# Altium PCB PCB_RocketPDBV4_2025-05-21.pcbdoc
Units mil, origin at the board's own origin, x right, y up, seen from the top; angles counter-clockwise.
Board outline 3400 x 3095 mil, 2 copper layers (Top Layer, Bottom Layer); 32 components, 35 nets, 112 pads, 50 vias.
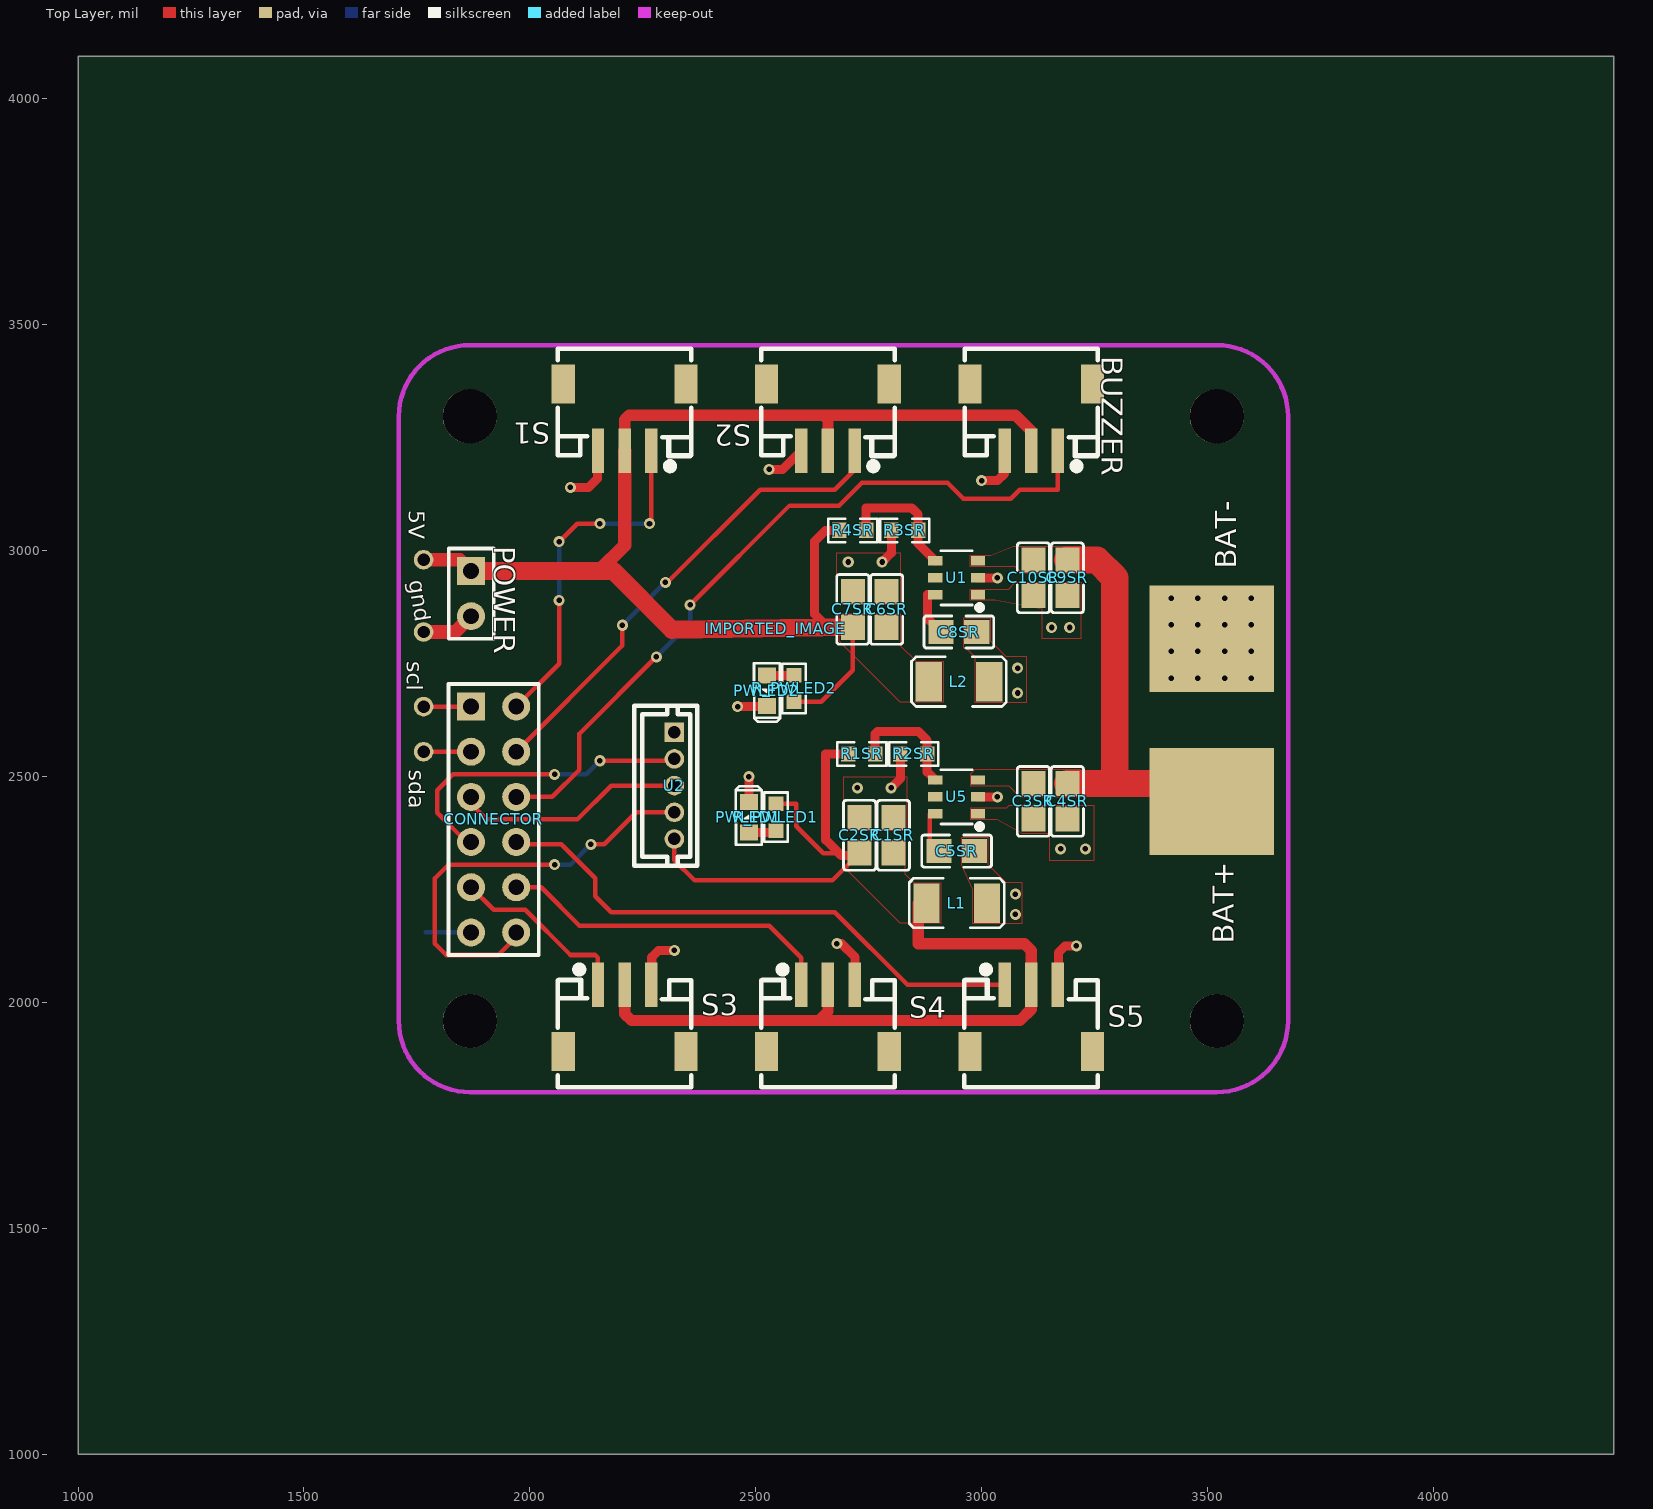
[diagram p0: Top Layer view]
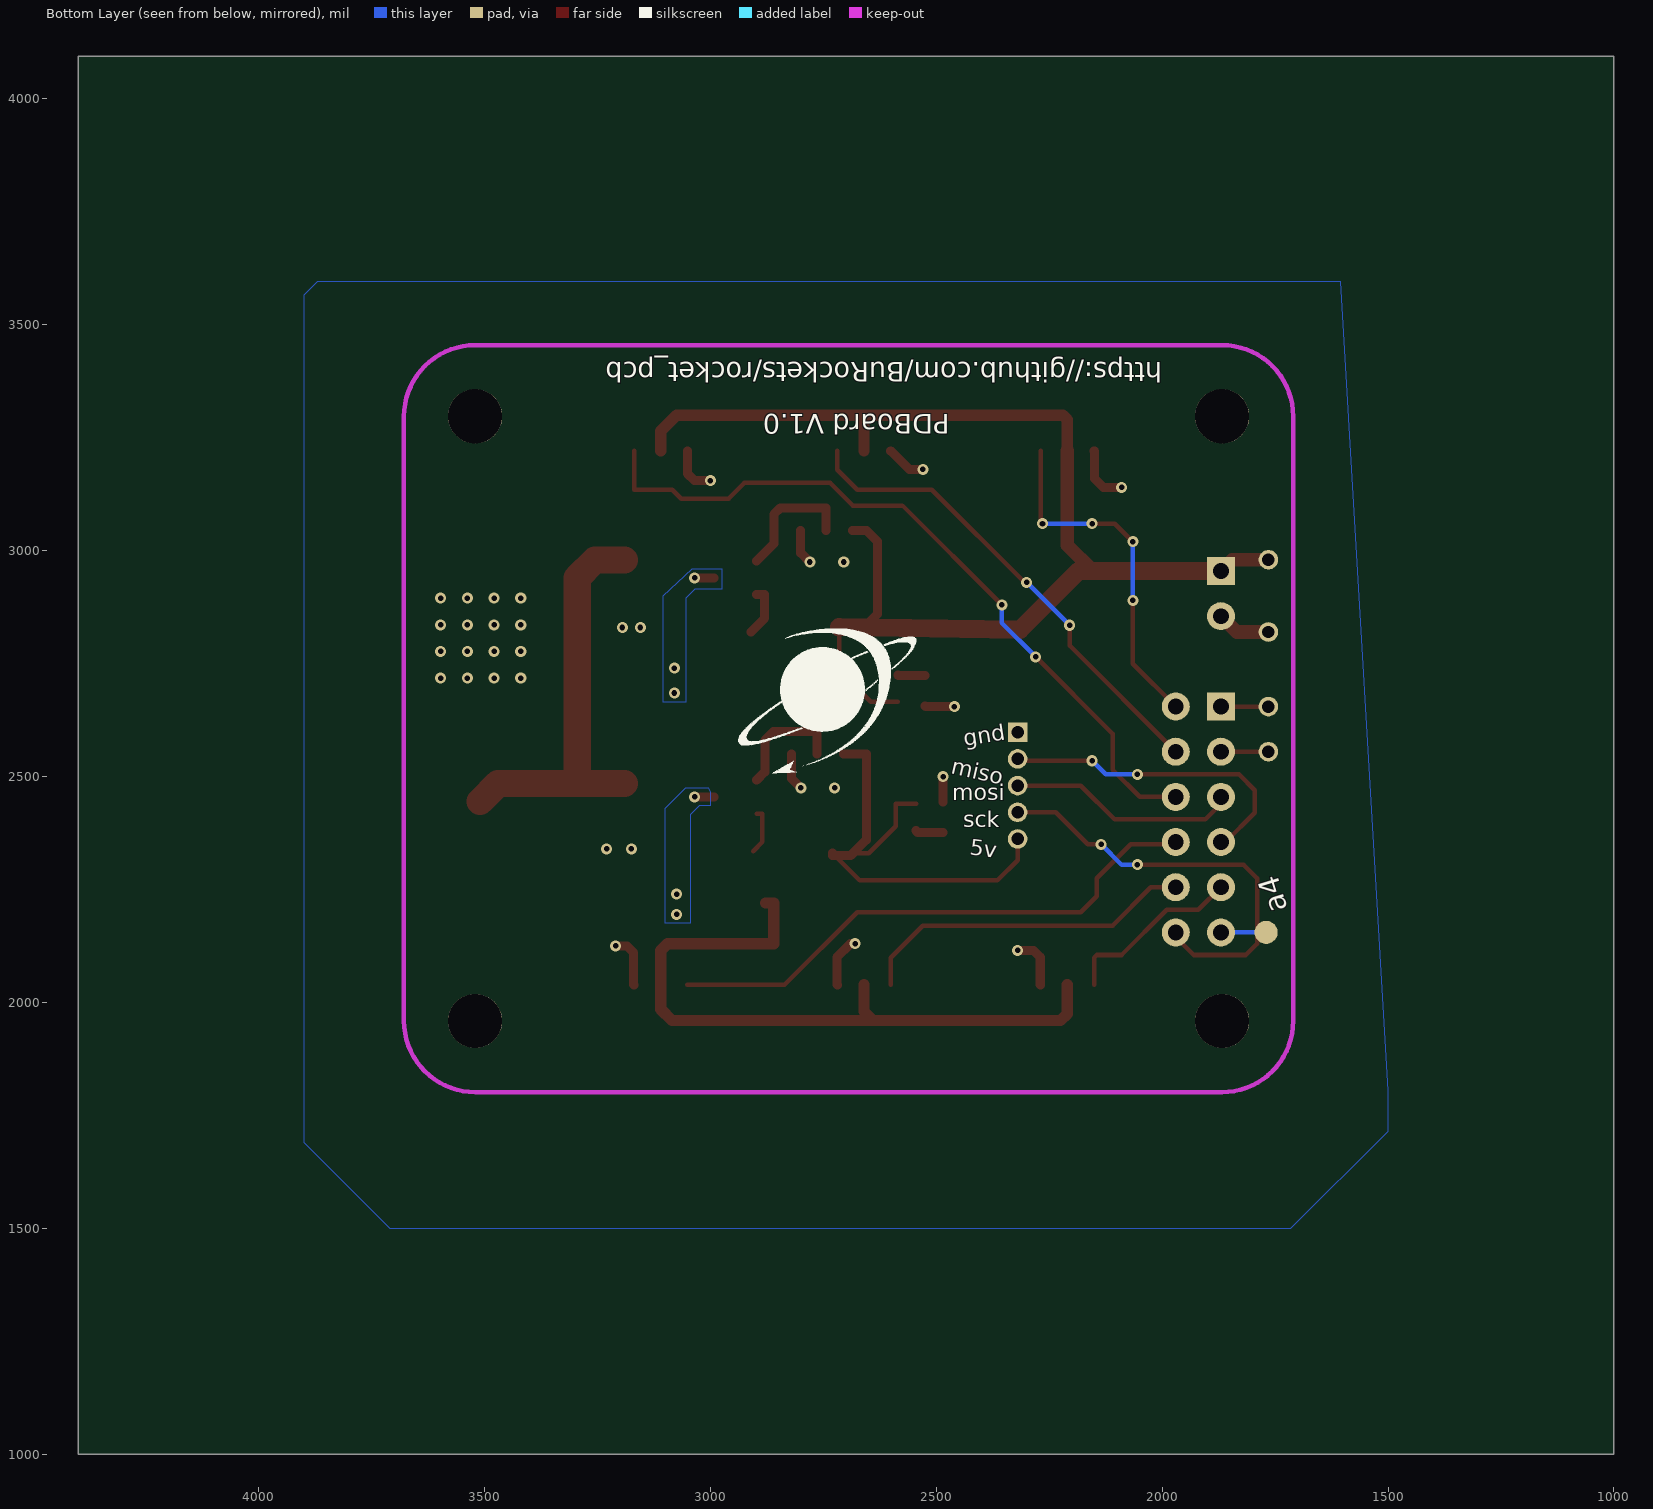
[diagram p1: Bottom Layer view, seen from below]

## Layer stack, top to bottom
Top Layer: signal copper (thickness not stored)
Dielectric: dielectric 12.6, FR-4, Dk 4.8
Bottom Layer: signal copper (thickness not stored)

## Board outline
4400,1000 1000,1000 1000,4095 4400,4095

## Components (designator, comment, footprint, x,y, rotation, side; value= is the part's Value field where it differs from the comment)
BUZZER "S3B-ZR-SM4A-TF(LF)(SN)" CONN-TH_S3B-ZR-SM4A-TF-LF-SN 3110,3294.99 r180 top
C1SR "22u" C0805 2805,2370 r270 top
C2SR "22u" C0805 2730,2370 r270 top
C3SR "10u" C0805 3115,2445 r90 top
C4SR "0.1u" C0805 3190,2445 r90 top
C5SR "0.1u" C0805 2945,2335 r180 top
C6SR "22u" C0805 2790,2870 r270 top
C7SR "22u" C0805 2715,2870 r270 top
C8SR "0.1u" C0805 2950,2820 r180 top
C9SR "0.1u" C0805 3190,2940 r90 top
C10SR "10u" C0805 3115,2940 r90 top
CONNECTOR "HDR-F-2.54_2x6" HDR-F-2.54_2X6 1920,2405 r270 top
IMPORTED_IMAGE "IMPORTED_IMAGE" IMPORTED_IMAGE 2544.73,2827.53 r0 top
L1 "10uH" L1210 2945,2220 r0 top
L2 "10uH" L1210 2950,2710 r0 top
POWER "HDR-F-2.54_1x2" HDR-F-2.54_1X2 1870,2905 r270 top
PWLED1 "LED-0603_R" LED0603_RED 2485,2410 r90 top
PWLED2 "LED-0603_R" LED0603_RED 2525,2690 r270 top
R1SR "100k" R0603 2735,2550 r180 top
R2SR "13.3k" R0603 2850,2550 r0 top
R3SR "13.3k" R0603 2830,3045 r0 top
R4SR "100k" R0603 2715,3045 r180 top
R_PWLED1 "10k" R0603 2545,2410 r270 top
R_PWLED2 "10k" R0603 2585,2695 r90 top
S1 "S3B-ZR-SM4A-TF(LF)(SN)" CONN-TH_S3B-ZR-SM4A-TF-LF-SN 2210,3294.99 r180 top
S2 "S3B-ZR-SM4A-TF(LF)(SN)" CONN-TH_S3B-ZR-SM4A-TF-LF-SN 2660,3294.99 r180 top
S3 "S3B-ZR-SM4A-TF(LF)(SN)" CONN-TH_S3B-ZR-SM4A-TF-LF-SN 2210,1964.99 r0 top
S4 "S3B-ZR-SM4A-TF(LF)(SN)" CONN-TH_S3B-ZR-SM4A-TF-LF-SN 2660,1964.99 r0 top
S5 "S3B-ZR-SM4A-TF(LF)(SN)" CONN-TH_S3B-ZR-SM4A-TF-LF-SN 3110,1964.99 r0 top
U1 "TPS54308DDCT" TSOT-23-6_L2.9-W1.6-P0.95-LS2.8-BR 2945,2940 r0 top
U2 "B5B-ZR-(LF)(SN)" CONN-TH_5P-P1.50_B5B-ZR-LF-SN 2320.01,2480 r270 top
U5 "TPS54308DDCT" TSOT-23-6_L2.9-W1.6-P0.95-LS2.8-BR 2945,2455 r0 top

## Footprints (in the part's own frame and the unit in brackets; to place one, negate y for a bottom-side part, rotate by r counter-clockwise, add the part's x,y. Pads: shape width x height; smd on the part's side, far side on the other; paste and mask are expansions set on the pad)
C0805 [mm]
  rect 1.41x1.35 smd paste-100 mask+0.051: 1(-1,0) 2(1,0)
  silkscreen extent -1.96,-0.9 1.96,0.9
CONN-TH_5P-P1.50_B5B-ZR-LF-SN [mm]
  rect 1.1x1.1 hole 0.7 paste+0 mask+0.051: 1(-3,0)
  round 1.1 hole 0.7 paste+0 mask+0.051: 2(-1.5,0) 3(0,0) 4(1.5,0) 5(3,0)
  silkscreen extent -4.5,-2.25 4.5,1.3
CONN-TH_S3B-ZR-SM4A-TF-LF-SN [mm]
  rect 0.7x2.5 smd paste+0 mask+0.051: 1(-1.5,1.876) 2(0,1.876) 3(1.5,1.877)
  rect 1.3x2.2 smd paste+0 mask+0.051: 4(3.45,-1.874) 5(-3.45,-1.877)
  silkscreen extent -3.75,-3.87 3.75,2.94
HDR-F-2.54_1X2 [mil]
  rect 62x62 hole 35 paste+0 mask+2: 1(-50,0)
  round 62 hole 35 paste+0 mask+2: 2(50,0)
  silkscreen extent -100,-49 100,50
HDR-F-2.54_2X6 [mil]
  rect 62x62 hole 35 paste+0 mask+2: 1(-250,-50)
  round 62 hole 35 paste+0 mask+2: 2(-250,50) 3(-150,-50) 4(-150,50) 5(-50,-50) 6(-50,50) 7(50,-50) 8(50,50) 9(150,-50) 10(150,50) 11(250,-50) 12(250,50)
  silkscreen extent -300,-100 300,100
IMPORTED_IMAGE [mil]
L1210 [mm]
  rect 1.474x2.22 smd paste+0 mask+0.051: 1(-1.703,0) 2(1.703,0)
  silkscreen extent -2.67,-1.4 2.67,1.4
LED0603_RED [mm]
  rect 0.9x1 smd paste+0 mask+0.051: 1(-0.85,0) 2(0.85,0)
  silkscreen extent -1.54,-0.73 1.75,0.73
R0603 [mil]
  rect 31.75x34.02 smd paste-3937.01 mask+2: 1(-29.66,0) 2(29.66,0)
  silkscreen extent -55,-26 55,26
TSOT-23-6_L2.9-W1.6-P0.95-LS2.8-BR [mm]
  rect 0.8x0.532 smd paste+0 mask+0.051: 1(1.2,-0.95) 2(1.2,0) 3(1.2,0.95) 4(-1.2,0.95) 5(-1.2,0) 6(-1.2,-0.95)
  silkscreen extent -0.88,-1.82 1.44,1.53

## Free pads (board coordinates)
  rect 275.59x236.22 smd paste+0 mask+2: 2(3510,2445) 4(3510,2805)
  round 43.31 hole 27.56 paste+0 mask+2: 5(1765,2655) 6(1765,2555) 7(1765,2980) 8(1765,2820)
  round 51.18 smd far side paste+4 mask+2: 10(1770,2155)
  round 120.08 hole 120.08 unplated paste+0: ""(1867.48,1958.94) ""(1867.48,3297.52) ""(3521.02,1958.94) ""(3521.02,3297.52)

## Via types
v1: diameter 24.41, hole 12.2, Top Layer to Bottom Layer, tented both sides, 50 vias

## Nets (pads, with @x,y where several pads share a name; then routed paths per layer and width w, separated by ;. In a path a pad name is that pad's centre, name@x,y a point inside that pad or via, vN(x,y) a via of type N, cw(c..) or ccw(c..) an arc to the next point about the centre after c; other vN are vias at no path point)
+5V: BUZZER.2 C1SR.2 C2SR.2 C6SR.2 C7SR.2 L1.1 L2.1 pad.7 POWER.1 R1SR.2 R4SR.2 R_PWLED1.1 R_PWLED2.1 S1.2 S2.2 S3.2 S4.2 S5.2 U2.5 | length 5660.7
  Top Layer w10: U2.5 2320,2315 2365,2270 2669.4,2270 C2SR.2 2649.4,2330.6 2590,2390 2590,2439.7 R_PWLED1.1 ; R_PWLED2.1 2645.34,2665.34 2715,2735 C7SR.2
  Top Layer w20: R4SR.2 2655,3045 2630,3020 2630,2860 2665,2825 2715,2825 C7SR.2 ; R1SR.2 2655,2550 2655,2360 2690,2325 2730,2325 C2SR.2
  Top Layer w25: S3.2 2210,1975 2225,1960 2640,1960 ; S1.2 2210,3290 2220,3300 2650,3300 ; S4.2 2660,1980 2640,1960 ; S2.2 2660,3290 2650,3300 ; L1.1@2877.9,2220 2860,2220 2860,2130 3095,2130 3110,2115 S5.2 3110,1985 3085,1960 2640,1960 ; BUZZER.2 3110,3265 3075,3300 2650,3300
  Top Layer w30: pad.7 1845,2980 POWER.1 ; 2152.98,2955 2210,3012.02 S1.2
  Top Layer w40: POWER.1 2185,2955 2315,2825 C7SR.2
ADC1IN4: CONNECTOR.11 pad.10 | length 100
  Bottom Layer w10: pad.10 CONNECTOR.11
BAT+: C3SR.2 C4SR.2 C9SR.2 C10SR.2 pad.2 U1.3 U5.3 | length 916.6
  Top Layer w60: C4SR.2 3470.63,2484.37 pad.2 ; C9SR.2 3255.63,2979.37 3295,2940 3295,2492.53 3303.16,2484.37
C8SR_2: C8SR.2 U1.6 | length 113
  Top Layer w20: U1.6 2880,2902.6 2880,2850.63 C8SR.2
CN2_4: S4.4
CN2_5: S4.5
CN3_4: BUZZER.4
CN3_5: BUZZER.5
CN4_4: S5.4
CN4_5: S5.5
CN5_4: S3.4
CN5_5: S3.5
CN6_4: S1.4
CN6_5: S1.5
CN7_4: S2.4
CN7_5: S2.5
GND: BUZZER.3 C1SR.1 C2SR.1 C3SR.1 C4SR.1 C6SR.1 C7SR.1 C9SR.1 C10SR.1 pad.4 pad.8 POWER.2 PWLED1.2 PWLED2.2 R2SR.1 R3SR.1 S1.3 S2.3 S3.3 S4.3 S5.3 U1.1 U2.1 U5.1 | length 1078.4
  Top Layer w20: v1(2090,3140) 2130,3140 2150,3160 2150,3220.18 S1.3 ; S3.3 2270,2039.82 2270,2100 2285,2115 v1(2320,2115) ; v1(2460,2655) 2523.46,2655 PWLED2.2 ; PWLED1.2 v1(2485,2500) ; v1(2530,3180) 2559.82,3180 S2.3 ; v1(2680,2130) 2690,2130 2720,2100 2720,2039.82 S4.3 ; v1(2780,2975) 2800.34,2995.34 R3SR.1 ; v1(2800,2475) 2820.34,2495.34 R2SR.1 ; v1(3000,3155) 3035,3155 3050.94,3170.94 BUZZER.3 ; S5.3 3170,2039.82 3170,2110 3185,2125 v1(3210,2125)
  Top Layer w30: pad.8 1835,2820 POWER.2
  other v1: 3175,2340 3230,2340 2725,2475 3420,2717.83 3479.06,2717.83 3538.11,2717.83 3597.17,2717.83 3420,2776.89 3479.06,2776.89 3538.11,2776.89 3597.17,2776.89 3155,2830 3195,2830 3420,2835.94 3479.06,2835.94 3538.11,2835.94 3597.17,2835.94 3420,2895 3479.06,2895 3538.11,2895 3597.17,2895 2705,2975
L2_2: C8SR.1 L2.2 U1.2 | length 42.8
  Top Layer w20: U1.2 v1(3035,2940)
  other v1: 3080,2685 3080,2740
MISO: CONNECTOR.7 U2.2 | length 705.5
  Top Layer w10: CONNECTOR.7 1860,2355 1795,2420 1795,2470 1830,2505 v1(2055,2505) ; v1(2155,2535) 2315.94,2535 U2.2
  Bottom Layer w10: v1(2055,2505) 2125,2505 v1(2155,2535)
MOSI: CONNECTOR.5 U2.3 | length 510.6
  Top Layer w10: CONNECTOR.5 1870,2440 1905,2405 2105,2405 2180,2480 U2.3
PWLED1_1: PWLED1.1 R_PWLED1.2 | length 61.6
  Top Layer w20: PWLED1.1 2541.19,2376.53 R_PWLED1.2
R3SR_2: R3SR.2 R4SR.1 U1.4 | length 289.8
  Top Layer w20: R4SR.1 2744.7,3095 2845,3095 2859.7,3080.3 R3SR.2 ; R3SR.2 2859.66,3015.49 U1.4
R_PWLED2_2: PWLED2.1 R_PWLED2.2 | length 60.5
  Top Layer w20: PWLED2.1 2583.81,2723.47 R_PWLED2.2
SCK: CONNECTOR.12 U2.4 | length 952.4
  Top Layer w10: CONNECTOR.12 1970,2145 1930,2105 1815,2105 1790,2130 1790,2275 1820,2305 v1(2055,2305) ; v1(2135,2350) 2165,2350 2235.9,2420.9 U2.4@2320,2420.9
  Bottom Layer w10: v1(2055,2305) 2090,2305 v1(2135,2350)
SCL: CONNECTOR.1 pad.5 | length 105
  Top Layer w10: pad.5 CONNECTOR.1
SDA: CONNECTOR.3 pad.6 | length 105
  Top Layer w10: pad.6 CONNECTOR.3
T1C1: CONNECTOR.9 S3.1 | length 405.7
  Top Layer w10: CONNECTOR.9 1920,2205 1990,2205 2090,2105 2145,2105 2150.95,2099.05 S3.1
T2C1: CONNECTOR.2 S1.1 | length 783.7
  Top Layer w10: CONNECTOR.2 2065,2750 v1(2065,2890) ; v1(2065,3020) 2105,3060 v1(2155,3060) ; v1(2265,3060) 2269.05,3064.05 S1.1
  Bottom Layer w10: v1(2065,2890) v1(2065,3020) ; v1(2155,3060) v1(2265,3060)
T2C2: CONNECTOR.4 S2.1 | length 1075.9
  Top Layer w10: CONNECTOR.4 2205,2790 v1(2205,2835) ; v1(2300,2930) 2305,2930 2510,3135 2675,3135 2719,3179 S2.1
  Bottom Layer w10: v1(2205,2835) v1(2300,2930)
T2C3: BUZZER.1 CONNECTOR.6 | length 1666.1
  Top Layer w10: CONNECTOR.6 2050,2455 2110,2515 2110,2595 v1(2280,2765) ; v1(2355,2880) 2575,3100 2685,3100 2735,3150 2925,3150 2960,3115 3065,3115 3085,3135 3169,3135 BUZZER.1
  Bottom Layer w10: v1(2280,2765) 2355,2840 v1(2355,2880)
T2C4: CONNECTOR.8 S5.1 | length 1235.3
  Top Layer w10: CONNECTOR.8 1975,2350 2070,2350 2145,2275 2145,2235 2180,2200 2675,2200 2836.13,2038.87 S5.1
T3C4: CONNECTOR.10 S4.1 | length 755.7
  Top Layer w10: CONNECTOR.10 2025,2255 2110,2170 2530,2170 2601,2099 S4.1
U5_2: C5SR.1 L1.2 U5.2 | length 42.8
  Top Layer w20: U5.2 v1(3035,2455)
  other v1: 3075,2195 3075,2240
U5_4: R1SR.1 R2SR.2 U5.4 | length 265.4
  Top Layer w20: R1SR.1 2764.66,2594.66 2770,2600 2860,2600 2879.66,2580.34 R2SR.2 2879.66,2510.49 U5.4
U5_6: C5SR.2 U5.6 | length 103.9
  Top Layer w10: U5.6 2885,2417.6 2885,2355.63 C5SR.2
pads on no net: U1.5 U5.5

## Polygon pours and split planes (outlines as drawn)
U5_2 on Bottom Layer (solid): 3100,2175 3100,2345 3100,2430 3055,2475 3005,2475 3000,2465 3000,2435 3025,2435 3045,2415 3045,2175
L2_2 on Bottom Layer (solid): 3055,2665 3105,2665 3105,2765 3105,2900 3040,2960 2975,2960 2975,2915 3030,2915 3035,2915 3055,2895
GND on Bottom Layer (solid): 1605,3595 3870,3595 3900,3565 3900,1690 3710,1500 1715,1500 1500,1715 1500,1805
+5V on Top Layer (solid): 2910,2175 2820,2175 2705,2290 2705,2360 2830,2360 2830,2285 2850,2265 2910,2265
U5_2 on Top Layer (solid): 2955,2365 2955,2305 2980,2250 2980,2175 3090,2175 3090,2265 3055,2265 3015,2305 3015,2365
GND on Top Layer (solid): 2975,2405 3025,2405 3035,2405 3090,2375 3150,2375 3150,2315 3220,2315 3250,2315 3250,2435 3220,2435 3080,2435 3060,2435 3055,2430 2975,2430
GND on Top Layer (solid): 2835,2380 2695,2380 2695,2500 2835,2500
BAT+ on Top Layer (solid): 2975,2480 3060,2480 3085,2455 3220,2455 3220,2515 3085,2515 2985,2515 2975,2505
L2_2 on Top Layer (solid): 2985,2665 3100,2665 3100,2765 3055,2765 3020,2800 3020,2850 2960,2850 2960,2785 2965,2785 2985,2765
+5V on Top Layer (solid): 2915,2665 2820,2665 2685,2800 2685,2860 2820,2860 2820,2790 2855,2755 2915,2755
GND on Top Layer (solid): 2820,2880 2680,2880 2680,2995 2820,2995
GND on Top Layer (solid): 3220,2870 3220,2805 3135,2805 3135,2870 3030,2890 2975,2890 2975,2915 3060,2915 3075,2930 3220,2930 3220,2870
BAT+ on Top Layer (solid): 3085,3010 3220,3010 3220,2950 3090,2950 3075,2965 2975,2965 2975,2990 3020,2990 3070,3010 3085,3010

## Keep-outs
Keep-Out Layer:
  lines w10: 1710,1958.94 ccw(c1867.48,1958.94) 1867.48,1801.46 ; 1710,3297.52 cw(c1867.48,3297.52) 1867.48,3455 ; 3521.02,1801.46 ccw(c3521.02,1958.94) 3678.5,1958.94 ; 3521.02,3455 cw(c3521.02,3297.52) 3678.5,3297.52

## Silkscreen, mask and mechanical layers (free items; w line width, h text height)
Top Overlay:
  text "5V" at 1732.28,3090 h35.43 r270
  text "BAT-" at 3563.62,2960 h47.24 r90
  text "gnd" at 1732.5,2932.23 h35.43 r279
  text "scl" at 1727.28,2755 h35.43 r270
  text "sda" at 1732.28,2515 h35.43 r270
  text "BAT+" at 3558.62,2130 h47.24 r90
Bottom Overlay:
  text "https://github.com/BuRockets/rocket_pcb" at 2000,3416.65 h43.31 r180
  text "PDBoard V1.0" at 2470,3301.65 h43.31 r180
  text "gnd" at 2437.23,2567.5 h35.43 r351
  text "miso" at 2468.99,2507.74 h35.43 r13
  text "mosi" at 2465,2447.28 h35.43
  text "sck" at 2440,2387.28 h35.43
  text "5v" at 2427.16,2327.42 h35.43 r7
  text "a4" at 1722.41,2206.91 h47.24 r253